# Altium PCB Lesson_06_2.PcbDoc
Units mil, origin at the board's own origin, x right, y up, seen from the top; angles counter-clockwise.
Board outline 3635 x 2990 mil, 2 copper layers (Top Layer, Bottom Layer); 22 components, 11 nets, 57 pads, 0 vias.
Unrouted connection lines stored in the file: 1.
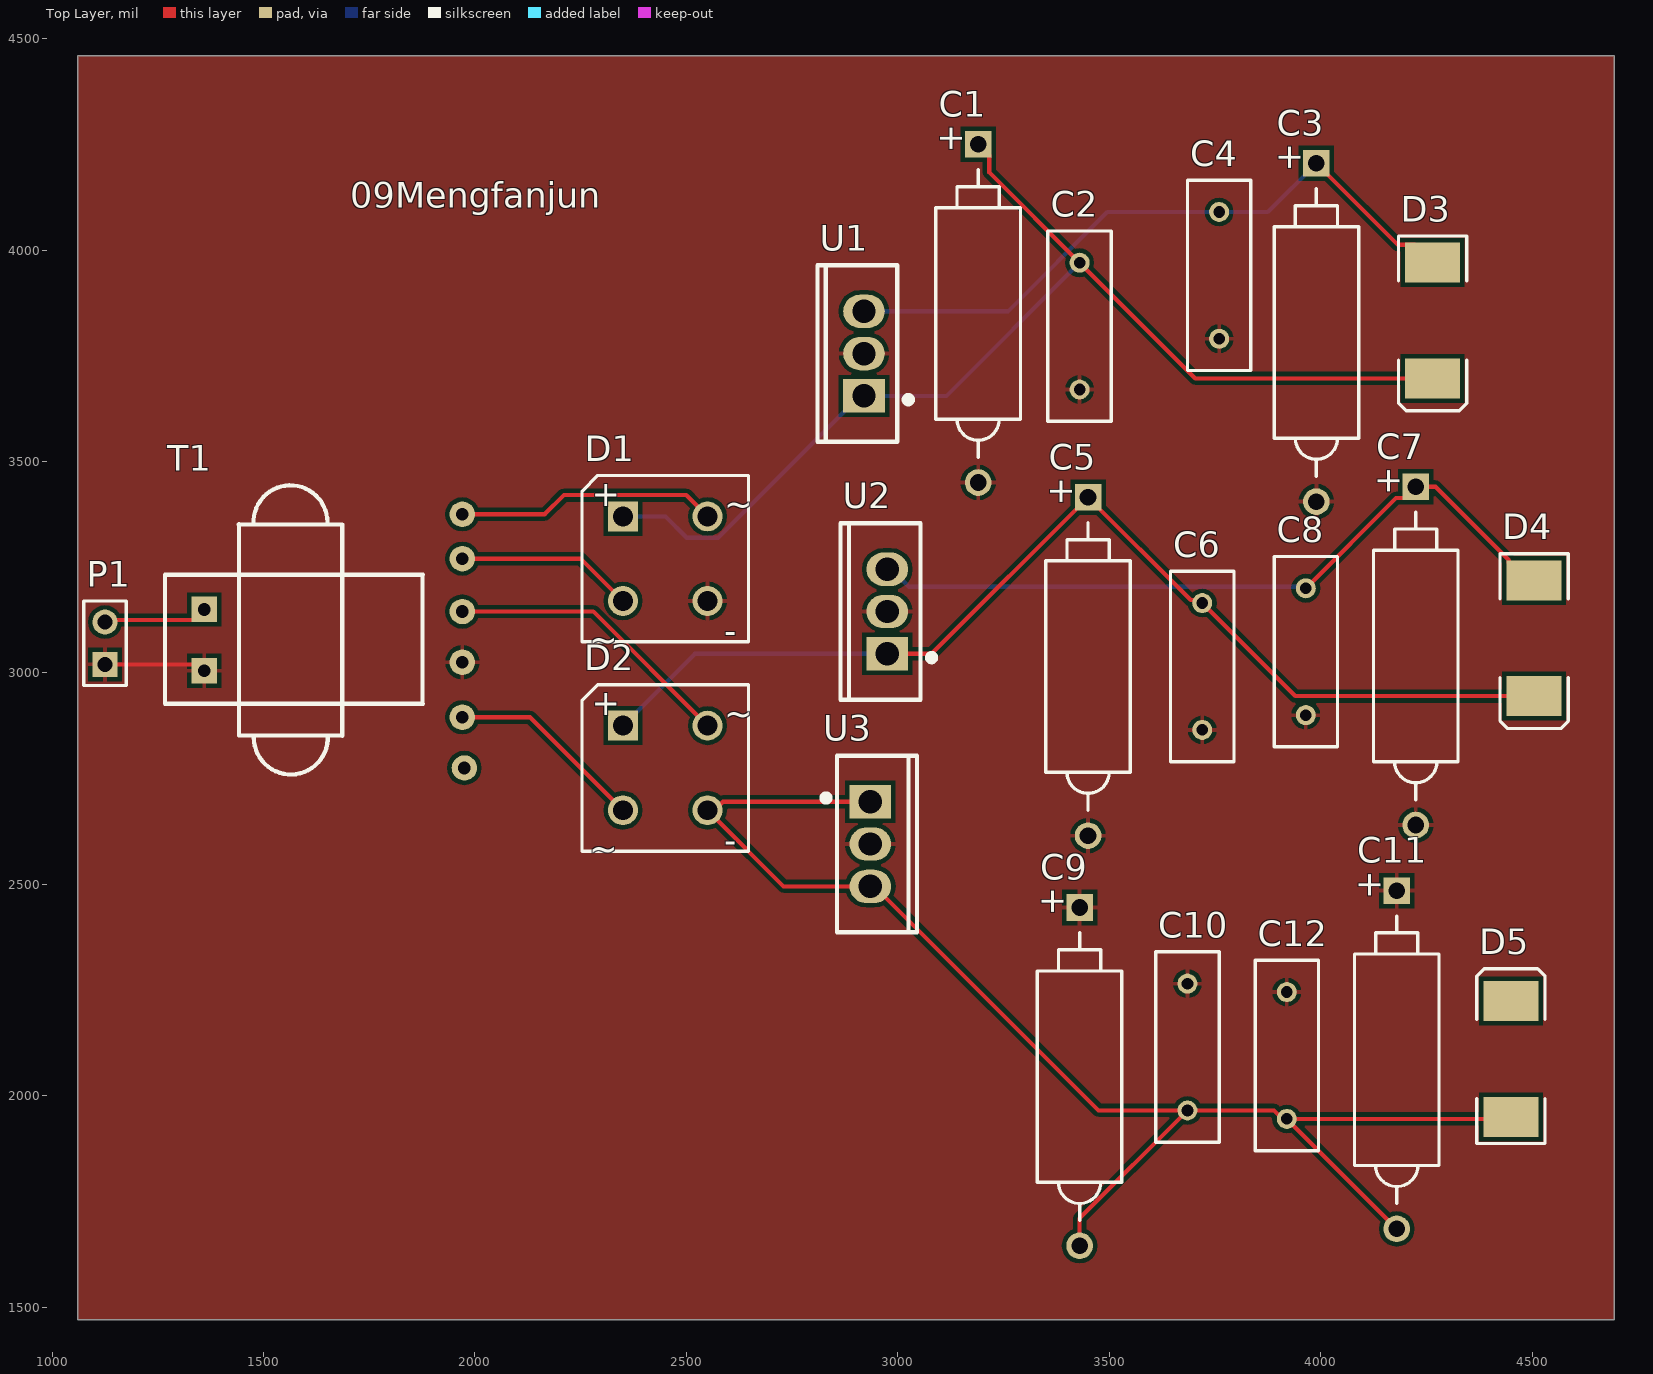
[diagram p0: Top Layer view]
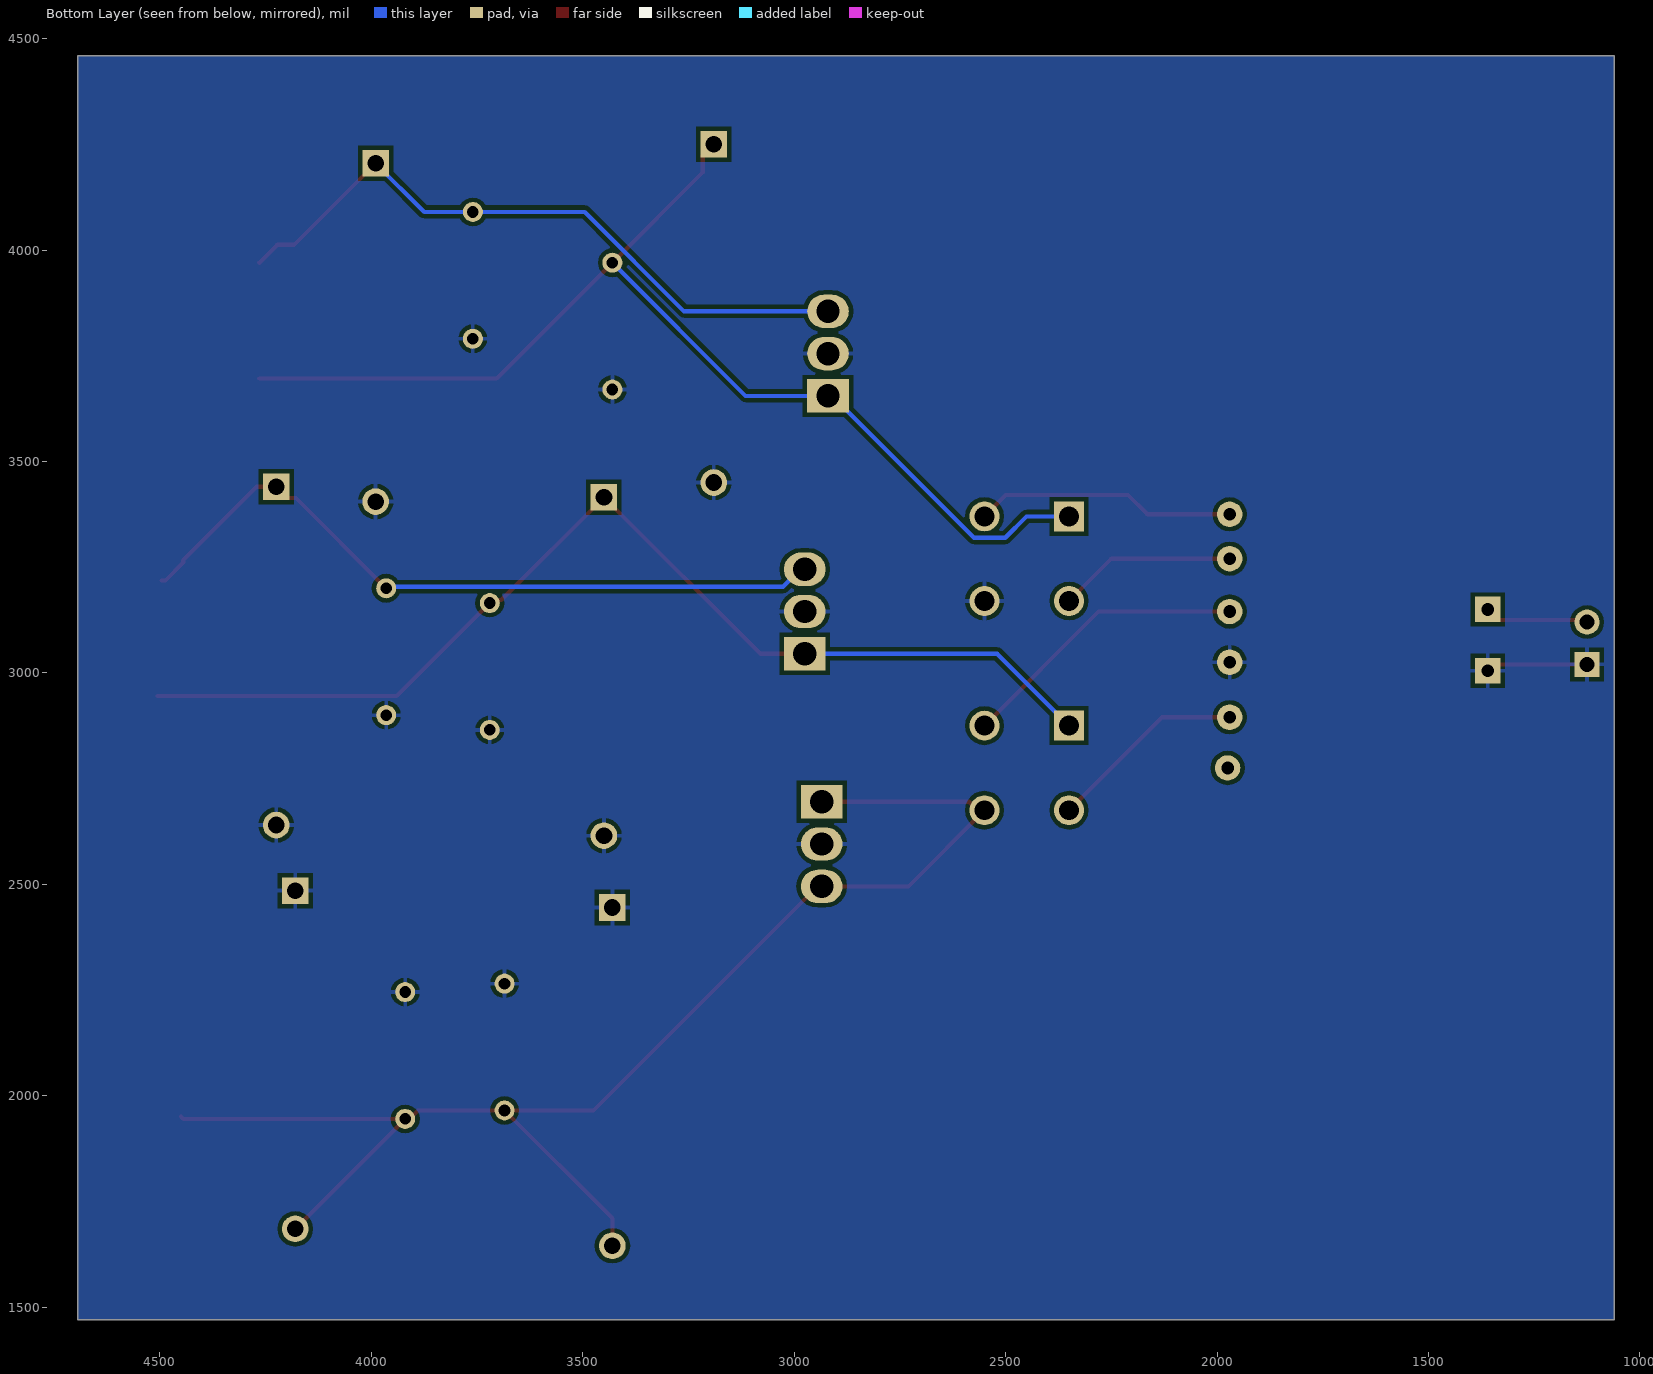
[diagram p1: Bottom Layer view, seen from below]

## Layer stack, top to bottom
Top Solder: solder mask 0.4, Solder Resist, Dk 3.5
Top Layer: signal copper 1.4
Dielectric 1: dielectric 12.6, FR-4, Dk 4.8
Bottom Layer: signal copper 1.4
Bottom Solder: solder mask 0.4, Solder Resist, Dk 3.5

## Board outline
1060,1470 1060,4460 4695,4460 4695,1470

## Design rules (kind name [scope] priority, off if disabled: settings)
Clearance [All] p1: gap=10 ignorepadtopadclearanceinfootprint=FALSE except(0: Arc-Hole Track-Hole SMDPad-Hole THPad-Hole Via-Hole Fill-Hole Poly-Hole Region-Hole Text-Hole)
PolygonConnect [All] p1: connectstyle=Relief reliefconductorwidth=10 reliefentries=4 polygonreliefangle="90 Angle" airgapwidth=10
RoutingVias [All] p1: holewidth=28 width=50 viastyle="Through Hole" minholewidth=28 minwidth=50 maxholewidth=28 maxwidth=50
SolderMaskExpansion [All] p1: expansion=4
Width [All] p1: maxlimit=10 minlimit=10 preferedwidth=10
30 further rules are at their usual default settings.

## Components (designator, comment, footprint, x,y, rotation, side; value= is the part's Value field where it differs from the comment)
C1 "Cap Pol2" POLAR0.8 3190,3850 r90 top value=3300uF
C2 "Cap" RAD-0.3 3430,3820 r90 top value=0.01uF
C3 "Cap Pol2" POLAR0.8 3990,3805 r90 top value=47uF
C4 "Cap" RAD-0.3 3760,3940 r90 top value=0.01uF
C5 "Cap Pol2" POLAR0.8 3450,3015 r90 top value=3300uF
C6 "Cap" RAD-0.3 3720,3015 r90 top value=0.01uF
C7 "Cap Pol2" POLAR0.8 4225,3040 r90 top value=47uF
C8 "Cap" RAD-0.3 3965,3050 r90 top value=0.01uF
C9 "Cap Pol2" POLAR0.8 3430,2045 r90 top value=3300uF
C10 "Cap" RAD-0.3 3685,2115 r90 top value=0.01uF
C11 "Cap Pol2" POLAR0.8 4180,2085 r90 top value=47uF
C12 "Cap" RAD-0.3 3920,2095 r90 top value=0.01uF
D1 "Bridge1" D-38 2450,3270 r0 top
D2 "Bridge2" D-38 2450,2775 r0 top
D3 "Diode" SMC 4265,3833.19 r270 top
D4 "Diode" SMC 4505,3081.81 r270 top
D5 "Diode" SMC 4450,2086.81 r90 top
P1 "Header 2" HDR1X2 1125,3020 r90 top
T1 "BianYaQi" PCBComponent_1 2160,3570 r0 top
U1 "LM7805" LM7805 2807.75,3546.3 r90 top
U2 "LM7805" LM7805 2862.75,2936.3 r90 top
U3 "LM7805" LM7805 3047.25,2803.7 r270 top

## Footprints (in the part's own frame and the unit in brackets; to place one, negate y for a bottom-side part, rotate by r counter-clockwise, add the part's x,y. Pads: shape width x height; smd on the part's side, far side on the other; paste and mask are expansions set on the pad)
D-38 [mm] "Bridge Rectifier; 4 Terminals; Body 9.4 x 9.4 mm (typ); Pitch 5.08 mm"
  rect 1.8x1.8 hole 1.2: 1(-2.54,2.54)
  round 1.8 hole 1.2: 2(-2.54,-2.54) 3(2.54,-2.54) 4(2.54,2.54)
  silkscreen extent -5,-5 5,5, body extent -5,-5 5,5, height 9.91
HDR1X2 [mm] "Connector; Header; 2 Position"
  rect 1.5x1.5 hole 0.9: 1(0,0)
  round 1.5 hole 0.9: 2(2.54,0)
  silkscreen extent -1.27,-1.27 3.81,1.27
LM7805 [mm]
  rect 2x2.5 hole 1.4: 1(2.761,-2.851)
  oval 2x2.5 hole 1.4: 2(5.301,-2.851) 3(7.841,-2.851)
  silkscreen extent 0,-5.71 10.6,-0.05
PCBComponent_1 [mil]
  rect 60x60 hole 30: 1(-800,-420) 2(-800,-565)
  round 60 hole 30: 3(-190,-195) 4(-190,-300) 5(-190,-425) 6(-190,-545) 7(-190,-675) 8(-185,-795)
  silkscreen extent -893,-810 -283,-127
POLAR0.8 [mm] "Polarized Capacitor; 2 Leads"
  rect 1.6x1.6 hole 1: 1(10.16,0)
  round 1.6 hole 1: 2(-10.16,0)
  silkscreen extent -8.64,-2.54 8.64,2.54
RAD-0.3 [mm] "Radial Cap, Thru-Hole; 2 Leads; 0.3 in Pin Spacing"
  round 1.2 hole 0.7: 1(-3.81,0) 2(3.81,0)
  silkscreen extent -5.71,-1.91 5.71,1.91
SMC [mm] "DO-214-AB/SMC; 2 C-Bend Leads; Body 7.9 x 5.9 mm, inc. leads (LxW)"
  rect 2.4x3.3 smd: 1(-3.475,0) 2(3.475,0)
  silkscreen extent -5.07,-2.05 5.43,2.05

## Part data
C1 C3 C5 C7 C9 C11: "Polarized Capacitor (Axial)", LatestRevisionDate=17-Jul-2002, LatestRevisionNote="Re-released for DXP Platform.", PackageDescription="Polarized Capacitor; 2 Leads", PackageReference=POLAR0.8, Published=8-Jun-2000, Publisher="Altium Limited"
C2 C4 C6 C8 C10 C12: "Capacitor", LatestRevisionDate=17-Jul-2002, LatestRevisionNote="Re-released for DXP Platform.", PackageDescription="Radial Cap, Thru-Hole; 2 Leads; 0.3 in Pin Spacing", PackageReference=RAD-0.3, Published=8-Jun-2000, Publisher="Altium Limited"
D1: "Full Wave Diode Bridge", DatasheetVersion=E2732B, LatestRevisionDate=29-May-2009, LatestRevisionNote="Sch pins A & K swapped.", PackageDescription="Bridge Rectifier; 4 Terminals; Body 9.4 x 9.4 mm (typ); Pitch 5.08 mm", PackageReference=D-38, Published=8-Jun-2000, Publisher="Altium Limited"
D2: library part Bridge1, "Full Wave Diode Bridge", DatasheetVersion=E2732B, LatestRevisionDate=29-May-2009, LatestRevisionNote="Sch pins A & K swapped.", PackageDescription="Bridge Rectifier; 4 Terminals; Body 9.4 x 9.4 mm (typ); Pitch 5.08 mm", PackageReference=D-38, Published=8-Jun-2000, Publisher="Altium Limited"
D3 D4 D5: "Default Diode", Code_JEDEC=DO-214-AB, LatestRevisionDate=17-Jul-2002, LatestRevisionNote="Re-released for DXP Platform.", PackageDescription="DO-214-AB/SMC; 2 C-Bend Leads; Body 7.9 x 5.9 mm, inc. leads (LxW)", PackageReference=SMC, PackageVersion=Sep-1996, Published=8-Jun-2000, Publisher="Altium Limited"
P1: "Header, 2-Pin", LatestRevisionDate=17-Jul-2002, LatestRevisionNote="Re-released for DXP Platform.", Publisher="Altium Limited"

## Nets (pads, with @x,y where several pads share a name; then routed paths per layer and width w, separated by ;. In a path a pad name is that pad's centre, name@x,y a point inside that pad or via, vN(x,y) a via of type N, cw(c..) or ccw(c..) an arc to the next point about the centre after c; other vN are vias at no path point)
+5: C3.1 C4.2 D3.1 U1.3 | length 1587.3
  Top Layer w10: C3.1 4182.76,4012.24 4222.76,4012.24 D3.1
  Bottom Layer w10: U1.3 3260.38,3855 3495.38,4090 C4.2 3875,4090 C3.1
+15: C7.1 C8.2 D4.1 U2.3 | length 1734.2
  Top Layer w10: C8.2 4178.5,3413.5 4198.5,3413.5 C7.1 4271.5,3440 4445.04,3266.46 4445.04,3260.87 4487.28,3218.62 D4.1@4496.14,3218.62
  Bottom Layer w10: U2.3 2984.84,3245 3026.22,3203.62 3961.38,3203.62 C8.2
-15: C9.2 C10.1 C11.2 C12.1 D2.3 D5.1 D5.2 U3.1 U3.3 | length 3400.9
  Top Layer w10: U3.1@2944.84,2695 U3.1 2586.47,2695 2566.47,2675 D2.3 2730,2495 U3.3 2944.84,2495 3474.84,1965 C10.1 ; C9.2 3430,1710 C10.1 ; C11.2 C12.1 ; D5.1 4445,1945 C12.1 ; C10.1 3889.92,1965 3909.92,1945 C12.1
GND: C1.2 C2.1 C3.2 C4.1 C5.2 C6.1 C7.2 C8.1 C9.1 C10.2 C11.1 C12.2 D1.3 P1.1 T1.2 T1.6 U1.2 U2.2 U3.2 | length 251.3
  Top Layer w10: P1.1 1345,3020 T1.2 ; C12.2@3909.92,2245 C12.2
NetC1_1: C1.1 C2.2 D1.1 D3.2 U1.1 | length 2698.1
  Top Layer w10: C1.1 3216.5,4223.5 3216.5,4183.5 C2.2 3703.62,3696.38 D3.2
  Bottom Layer w10: D1.1 2450.45,3370 2500.88,3319.57 2574.72,3319.57 2910.16,3655 U1.1 3115,3655 C2.2
NetC5_1: C5.1 C6.2 D2.1 D4.2 U2.1 | length 2573.4
  Top Layer w10: U2.1 3080,3045 C5.1 3692.87,3172.13 3712.87,3172.13 C6.2 3940,2945 D4.2
  Bottom Layer w10: D2.1 2520,3045 U2.1
NetD1_2: D1.2 T1.4 | length 421.4
  Top Layer w10: T1.4 2250,3270 D1.2
NetD1_4: D1.4 T1.3 | length 619.7
  Top Layer w10: T1.3 2164.87,3375 2210.3,3420.43 2499.57,3420.43 D1.4
NetD2_2: D2.2 T1.7 | length 471.1
  Top Layer w10: T1.7 2130,2895 D2.2
NetD2_4: D2.4 T1.5 | length 691.8
  Top Layer w10: T1.5 2280,3145 D2.4
NetP1_2: P1.2 T1.1 | length 247.4
  Top Layer w10: P1.2 1130,3125 1335,3125 T1.1
pads on no net: T1.8

## Polygon pours and split planes (outlines as drawn)
GND on Top Layer "Top Layer-No Net" (solid, pour order 3): 1060,1470 1060,4460 4695,4460 4695,1470
GND on Bottom Layer "Top Layer-No Net1" (solid, pour order 4): 1060,1470 1060,4460 4695,4460 4695,1470

## Silkscreen, mask and mechanical layers (free items; w line width, h text height)
Top Overlay:
  text "09Mengfanjun" at 1705,4100 h60
Mechanical 1:
  the board outline again, w10

## Text inside footprints (layer, text, board x,y; h text height)
C1: Top Overlay "+" at 3152.6,4230 h59.06 r90
C3: Top Overlay "+" at 3952.6,4185 h59.06 r90
C5: Top Overlay "+" at 3412.6,3395 h59.06 r90
C7: Top Overlay "+" at 4187.6,3420 h59.06 r90
C9: Top Overlay "+" at 3392.6,2425 h59.06 r90
C11: Top Overlay "+" at 4142.6,2465 h59.06 r90
D1: Top Overlay "+" at 2276.38,3394.57 h59.06; Top Overlay "-" at 2590,3070 h59.05; Top Overlay "~" at 2270,3050 h59.05; Top Overlay "~" at 2590,3370 h59.05
D2: Top Overlay "+" at 2276.38,2899.57 h59.06; Top Overlay "-" at 2590,2575 h59.05; Top Overlay "~" at 2270,2555 h59.05; Top Overlay "~" at 2590,2875 h59.05